# EAGLE board sidpi-revd (EAGLE 6.5.0)
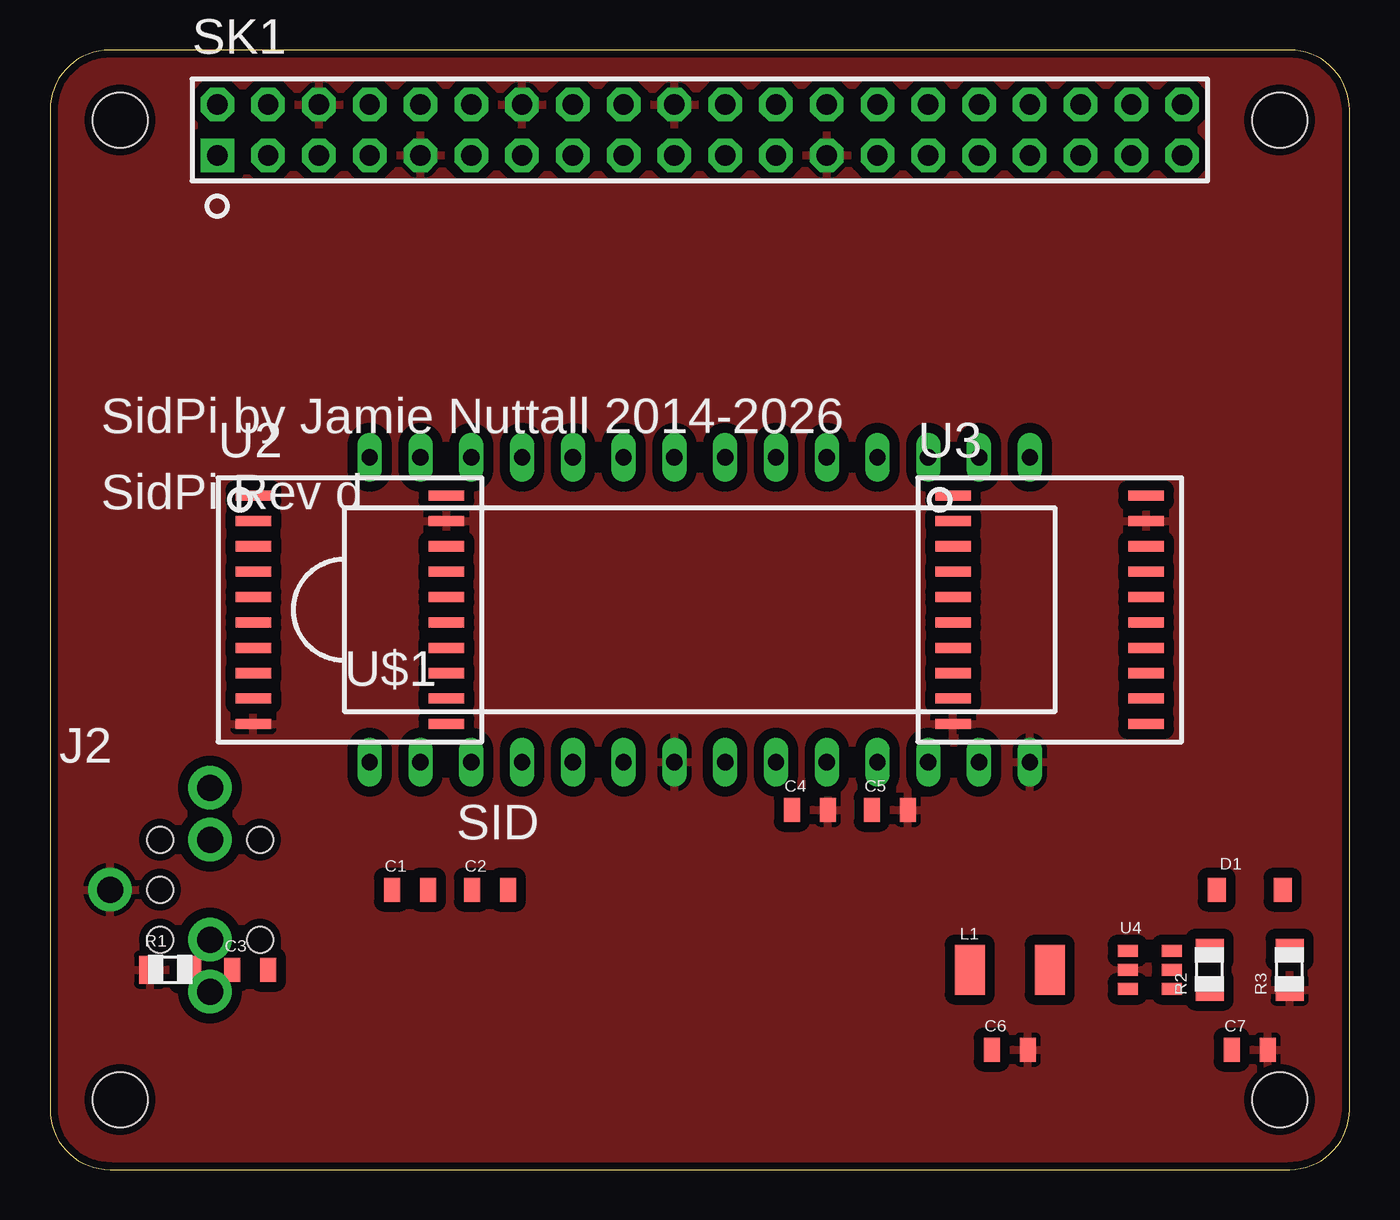
[diagram p0: board, top side]
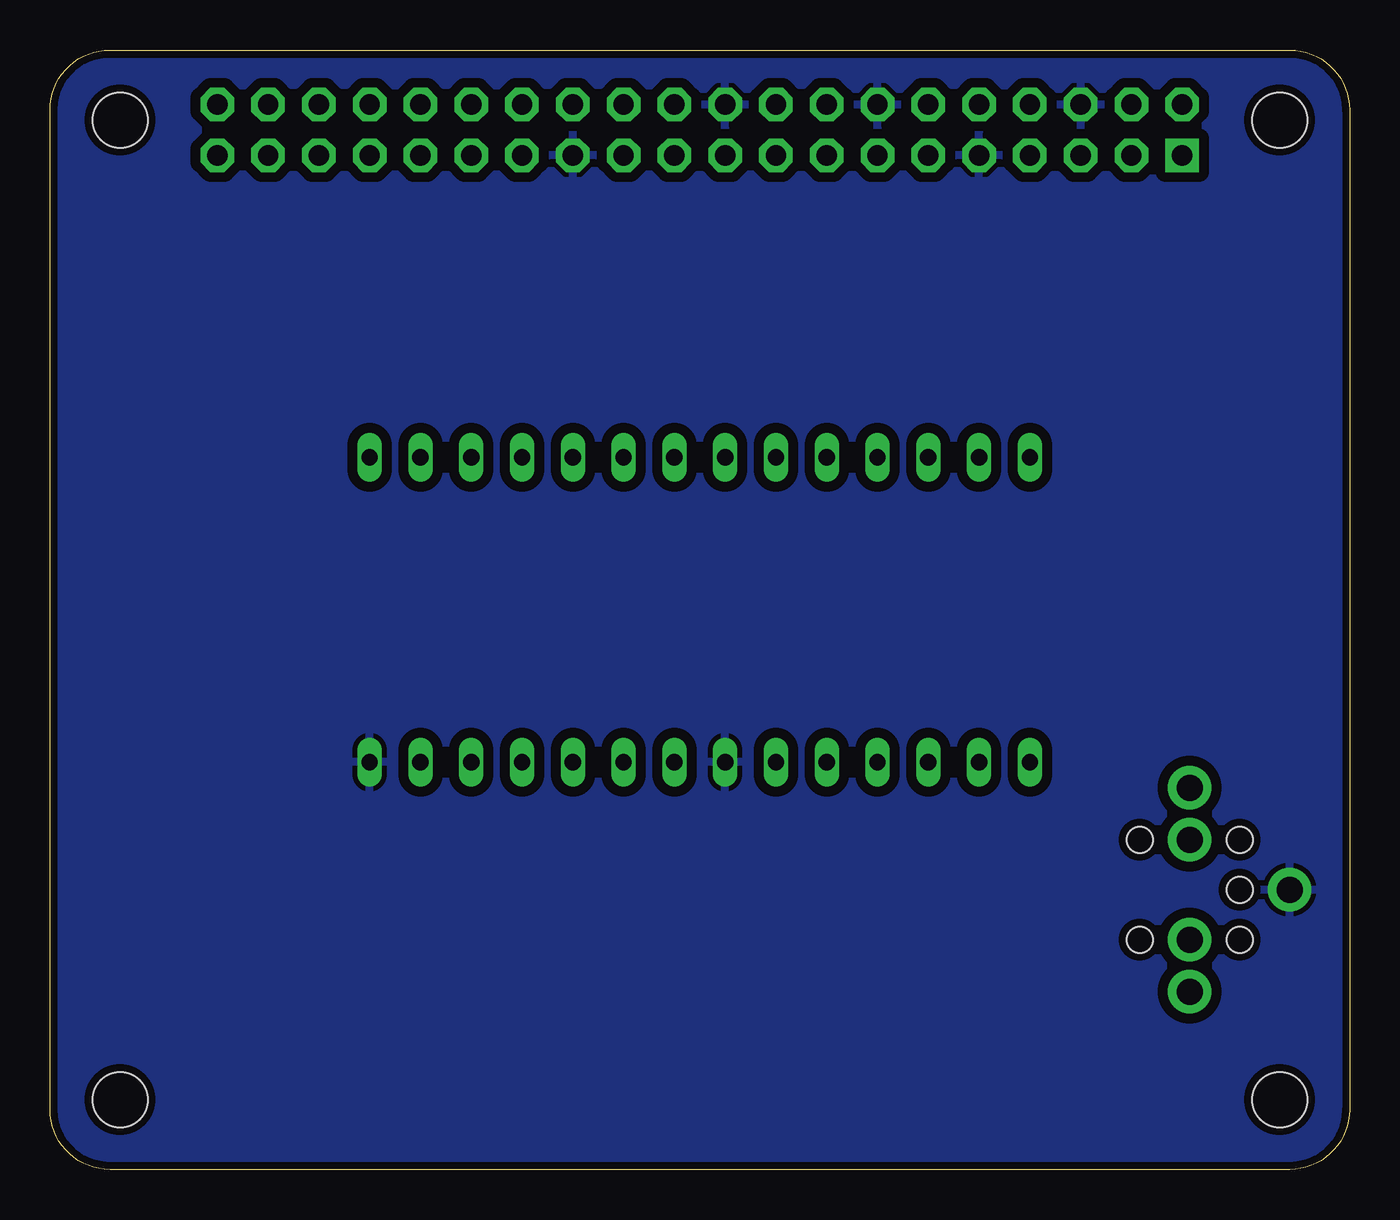
[diagram p1: board, bottom side, seen from below]

Size 65 x 56 mm. Coordinates in mm from the lower left corner, seen from the top.
Outline: 3,0 62,0 arc90 65,3 65,53 arc90 62,56 3,56 arc90 0,53 0,3 arc90 3,0
Copper layers (1*16): Top 0.0356mm / dielectric 1.5011mm / Bottom 0.0356mm
Design rules "LaenPCBOrder": minimum track width 6mil, minimum drill 13mil, track to track 6mil, track to pad 6mil, pad to pad 6mil, via to via 6mil, smd to smd 6mil, copper to edge 15mil, drill to drill 6mil, minimum pad ring 7mil, minimum via ring 7mil, stop-mask expansion 3mil, vias tented up to drill 0mil, thermal gap 10mil
Net classes: 0 default: width 0.5 mm, drill 0.4 mm, clearance 0.5 mm; 1 VDD: width 1 mm, drill 0.4 mm, clearance 0.5 mm; 2 VCC: width 1 mm, drill 0.4 mm, clearance 0.5 mm
Holes 2.75 mm at 3.5,3.5 61.5,3.5 3.5,52.5 61.5,52.5

## Footprints (pad centres in the part's own frame; a part is rotated, then mirrored left to right if it is on the bottom)
0805 = smd 0.8 x 1.2: 1 -0.9,0; 2 0.9,0
SOD-123 = smd 0.9 x 1.2: A 1.65,0; C -1.65,0
AUDIO-JACK-KIT = drill 1.3 pad 2.184: RING 5,5.1; RSH 5,2.5; SLEEVE 0,0; TIP 5,-5.1; TSH 5,-2.5 | hole 1.3: 2.5,0; 2.5,2.5; 2.5,-2.5; 7.5,2.5; 7.5,-2.5
IND-5X5 = smd 1.5 x 2.5: 1 -2,0; 2 2,0
R0805 = smd 1.1 x 1.4: 1 -1,0; 2 1,0
GPIO-CONNECTOR-40 = drill 1.016 pad 1.676 square: 1 -24.13,-1.27 | drill 1.016 pad 1.676 octagon: 2 -24.13,1.27; 3 -21.59,-1.27; 4 -21.59,1.27; 5 -19.05,-1.27; 6 -19.05,1.27; 7 -16.51,-1.27; 8 -16.51,1.27; 9 -13.97,-1.27; 10 -13.97,1.27; 11 -11.43,-1.27; 12 -11.43,1.27; 13 -8.89,-1.27; 14 -8.89,1.27; 15 -6.35,-1.27; 16 -6.35,1.27; 17 -3.81,-1.27; 18 -3.81,1.27; 19 -1.27,-1.27; 20 -1.27,1.27; 21 1.27,-1.27; 22 1.27,1.27; 23 3.81,-1.27; 24 3.81,1.27; 25 6.35,-1.27; 26 6.35,1.27; 27 8.89,-1.27; 28 8.89,1.27; 29 11.43,-1.27; 30 11.43,1.27; 31 13.97,-1.27; 32 13.97,1.27; 33 16.51,-1.27; 34 16.51,1.27; 35 19.05,-1.27; 36 19.05,1.27; 37 21.59,-1.27; 38 21.59,1.27; 39 24.13,-1.27; 40 24.13,1.27
SOIC20W = smd 1.778 x 0.508: 1 -4.826,5.715; 2 -4.826,4.445; 3 -4.826,3.175; 4 -4.826,1.905; 5 -4.826,0.635; 6 -4.826,-0.635; 7 -4.826,-1.905; 8 -4.826,-3.175; 9 -4.826,-4.445; 10 -4.826,-5.715; 11 4.826,-5.715; 12 4.826,-4.445; 13 4.826,-3.175; 14 4.826,-1.905; 15 4.826,-0.635; 16 4.826,0.635; 17 4.826,1.905; 18 4.826,3.175; 19 4.826,4.445; 20 4.826,5.715
SOT-23-6 = smd 1 x 0.6: 1 -1.1,0.95; 2 -1.1,0; 3 -1.1,-0.95; 4 1.1,-0.95; 5 1.1,0; 6 1.1,0.95
DIL28-6 = drill 0.813 long: 1 -16.51,-7.62; 2 -13.97,-7.62; 3 -11.43,-7.62; 4 -8.89,-7.62; 5 -6.35,-7.62; 6 -3.81,-7.62; 7 -1.27,-7.62; 8 1.27,-7.62; 9 3.81,-7.62; 10 6.35,-7.62; 11 8.89,-7.62; 12 11.43,-7.62; 13 13.97,-7.62; 14 16.51,-7.62; 15 16.51,7.62; 16 13.97,7.62; 17 11.43,7.62; 18 8.89,7.62; 19 6.35,7.62; 20 3.81,7.62; 21 1.27,7.62; 22 -1.27,7.62; 23 -3.81,7.62; 24 -6.35,7.62; 25 -8.89,7.62; 26 -11.43,7.62; 27 -13.97,7.62; 28 -16.51,7.62

## Placement (x,y rotation side)
C1  2.2nF  [0805]  18,14 0 top
C2  2.2nF  [0805]  22,14 0 top
C3  1µF  [0805]  10,10 0 top
C4  100nF  [0805]  38,18 0 top
C5  100nF  [0805]  42,18 0 top
C6  22µF  [0805]  48,6 0 top
C7  22µF  [0805]  60,6 0 top
D1  SS14  [SOD-123]  60,14 0 top
J2  [AUDIO-JACK-KIT]  3,14 0 top
L1  22µH  [IND-5X5]  48,10 0 top
R1  1K  [R0805]  6,10 0 top
R2  150K  [R0805]  58,10 90 top
R3  7.87K  [R0805]  62,10 90 top
SK1  [GPIO-CONNECTOR-40]  32.5,52 0 top
U2  [SOIC20W]  15,28 0 top
U3  [SOIC20W]  50,28 0 top
U4  [SOT-23-6]  55,10 0 top
U$1  [DIL28-6]  32.5,28 0 top

## Library data of the parts
C1-C7 = SparkFun-Capacitors
D1 = diodes
J2 = SparkFun-Connectors
L1 = inductors
R1-R3 = adafruit
SK1 = jt-raspberry-pi
U2 U3 = 74HCT245
U4 = MT3608
U$1 = Mos6581_sid

## Nets
+3V3: SK1.1 SK1.17 U2.1 U3.1
GND: C4.2 C5.2 C6.2 C7.2 J2.SLEEVE R1.1 R3.1 SK1.6 SK1.9 SK1.14 SK1.20 SK1.25 U2.10 U2.19 U3.10 U3.19 U4.2 U$1.7 U$1.14
N$1: SK1.5 U3.7 U3.13 U$1.8
N$2: SK1.12 U3.5 U3.15 U$1.12
N$3: C1.1 U$1.1
N$4: SK1.8 U3.6 U3.14 U$1.13
N$5: SK1.10 U2.9 U2.11 U$1.22
N$6: C2.1 U$1.3
N$7: SK1.11 U2.8 U2.12 U$1.21
N$8: C3.2 J2.RING J2.TIP
N$9: SK1.7 U3.8 U3.12 U$1.6
N$10: SK1.13 U2.7 U2.13 U$1.20
N$11: SK1.15 U2.6 U2.14 U$1.19
N$12: SK1.18 U2.5 U2.15 U$1.18
N$13: SK1.19 U2.4 U2.16 U$1.17
N$14: SK1.21 U2.3 U2.17 U$1.16
N$15: C2.2 U$1.4
N$17: C1.2 U$1.2
N$19: SK1.23 U2.2 U2.18 U$1.15
N$20: SK1.16 U3.4 U3.16 U$1.11
N$23: C3.1 R1.2 U$1.27
N$24: SK1.24 U3.2 U3.18 U$1.9
N$25: SK1.22 U3.3 U3.17 U$1.10
N$26: SK1.3 U3.9 U3.11 U$1.5
N$27: D1.A L1.2 U4.1
N$29: R2.1 R3.2 U4.3
VCC [VCC]: C4.1 C6.1 L1.1 SK1.2 U2.20 U3.20 U4.4 U4.5 U$1.25
VDD [VDD]: C5.1 C7.1 D1.C R2.2 U$1.28

## Tracks (layer width: path | path; a pad name or v marks a point on that pad's centre or on a via)
GND
  pour Top: 0,0 65,0 65,56 0,56
  pour Bottom: 0,0 65,0 65,56 0,56

## Text on the board
tNames: SidPi by Jamie Nuttall 2014-2026 | SidPi Rev d | SID